# Altium PCB PCB1.PcbDoc
Units mm, origin at the board's own origin, x right, y up, seen from the top; angles counter-clockwise.
Board outline 66.29 x 69.22 mm, 2 copper layers (Top Layer, Bottom Layer); 12 components, 12 nets, 28 pads, 0 vias.
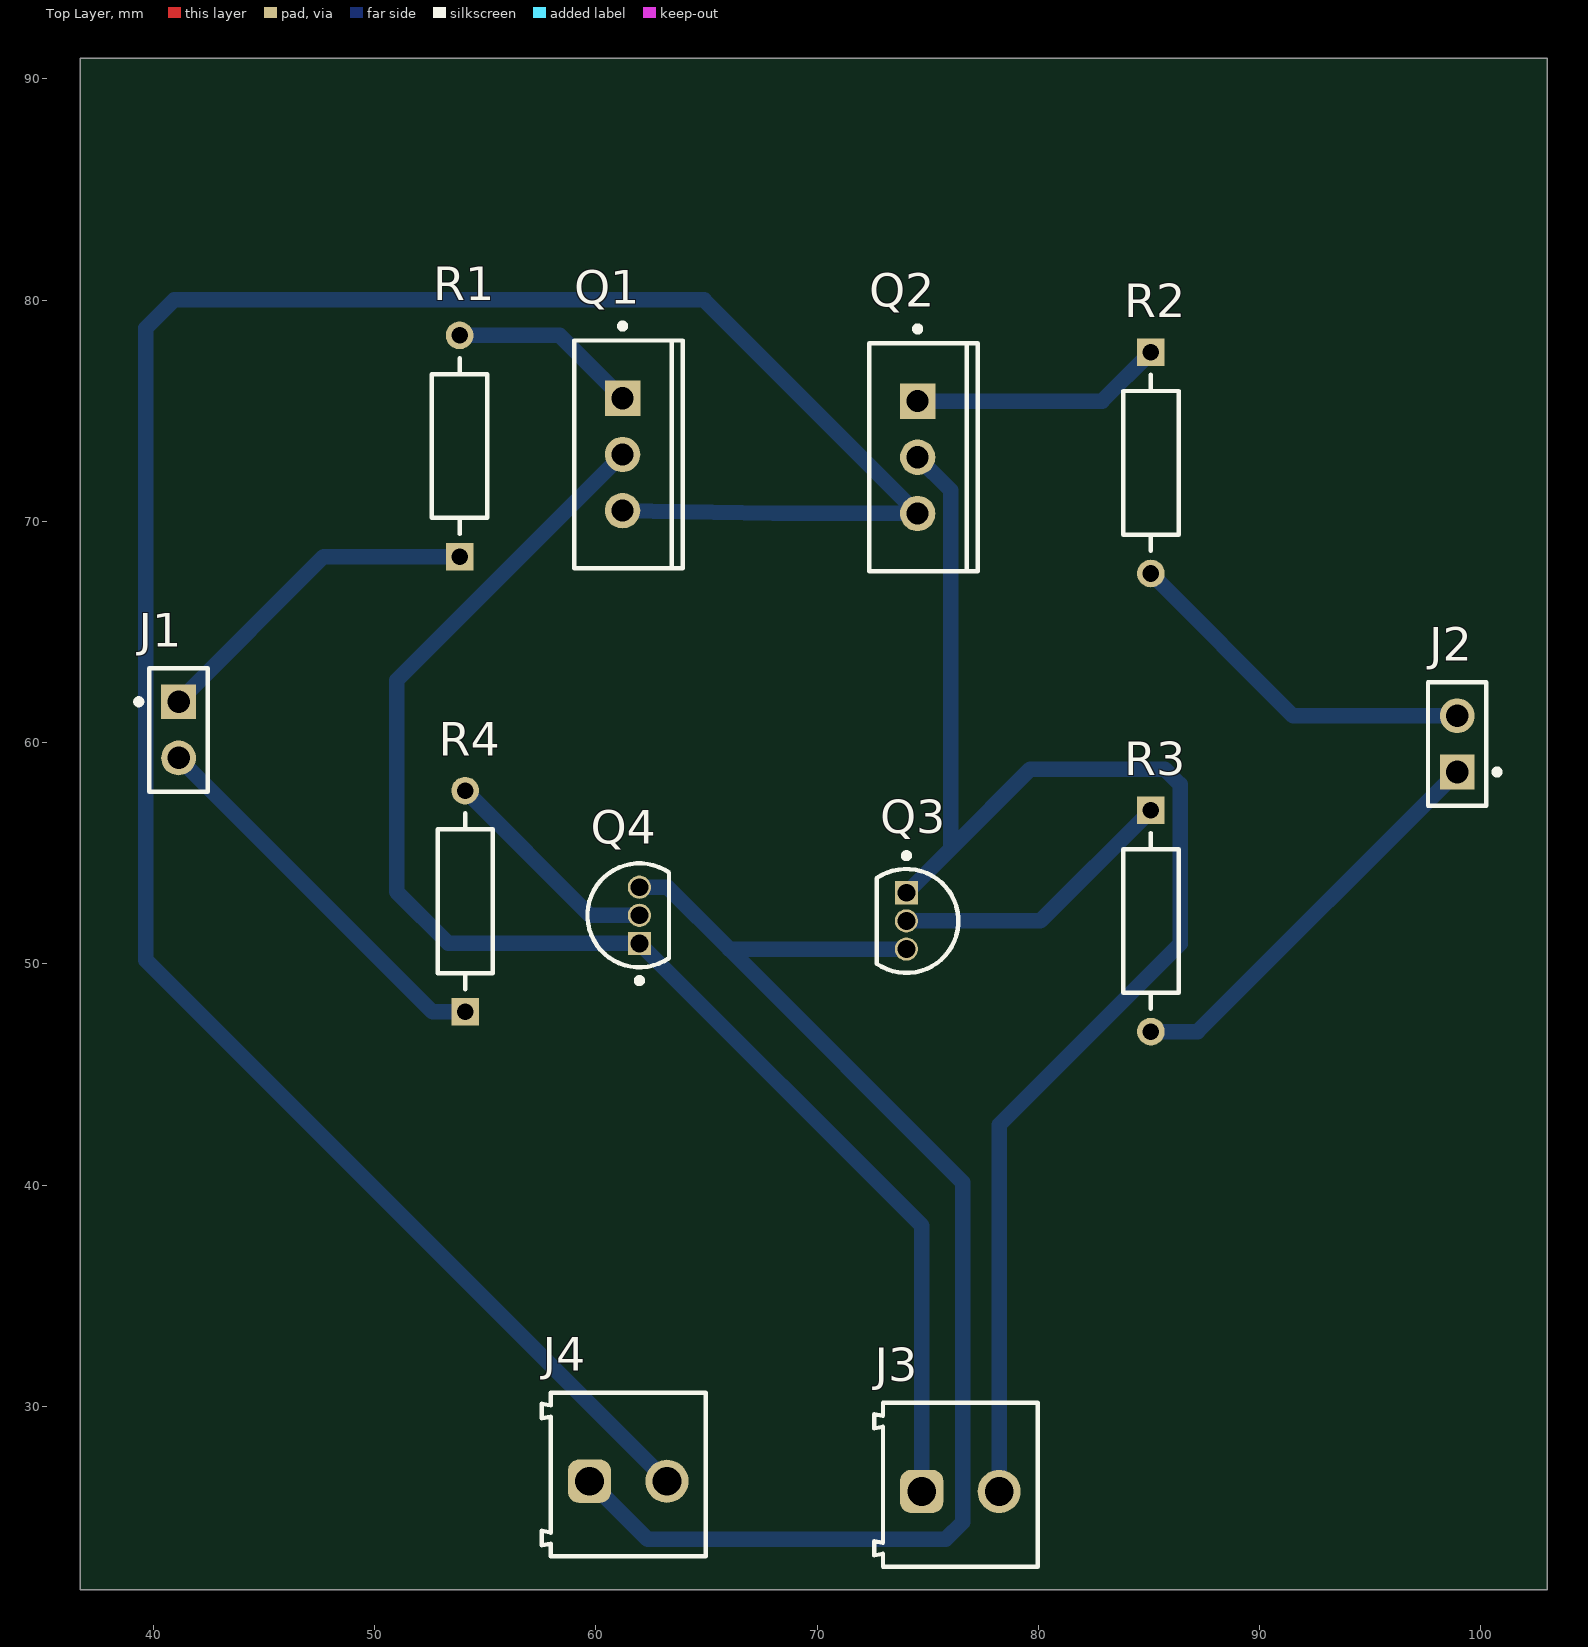
[diagram p0: Top Layer view]
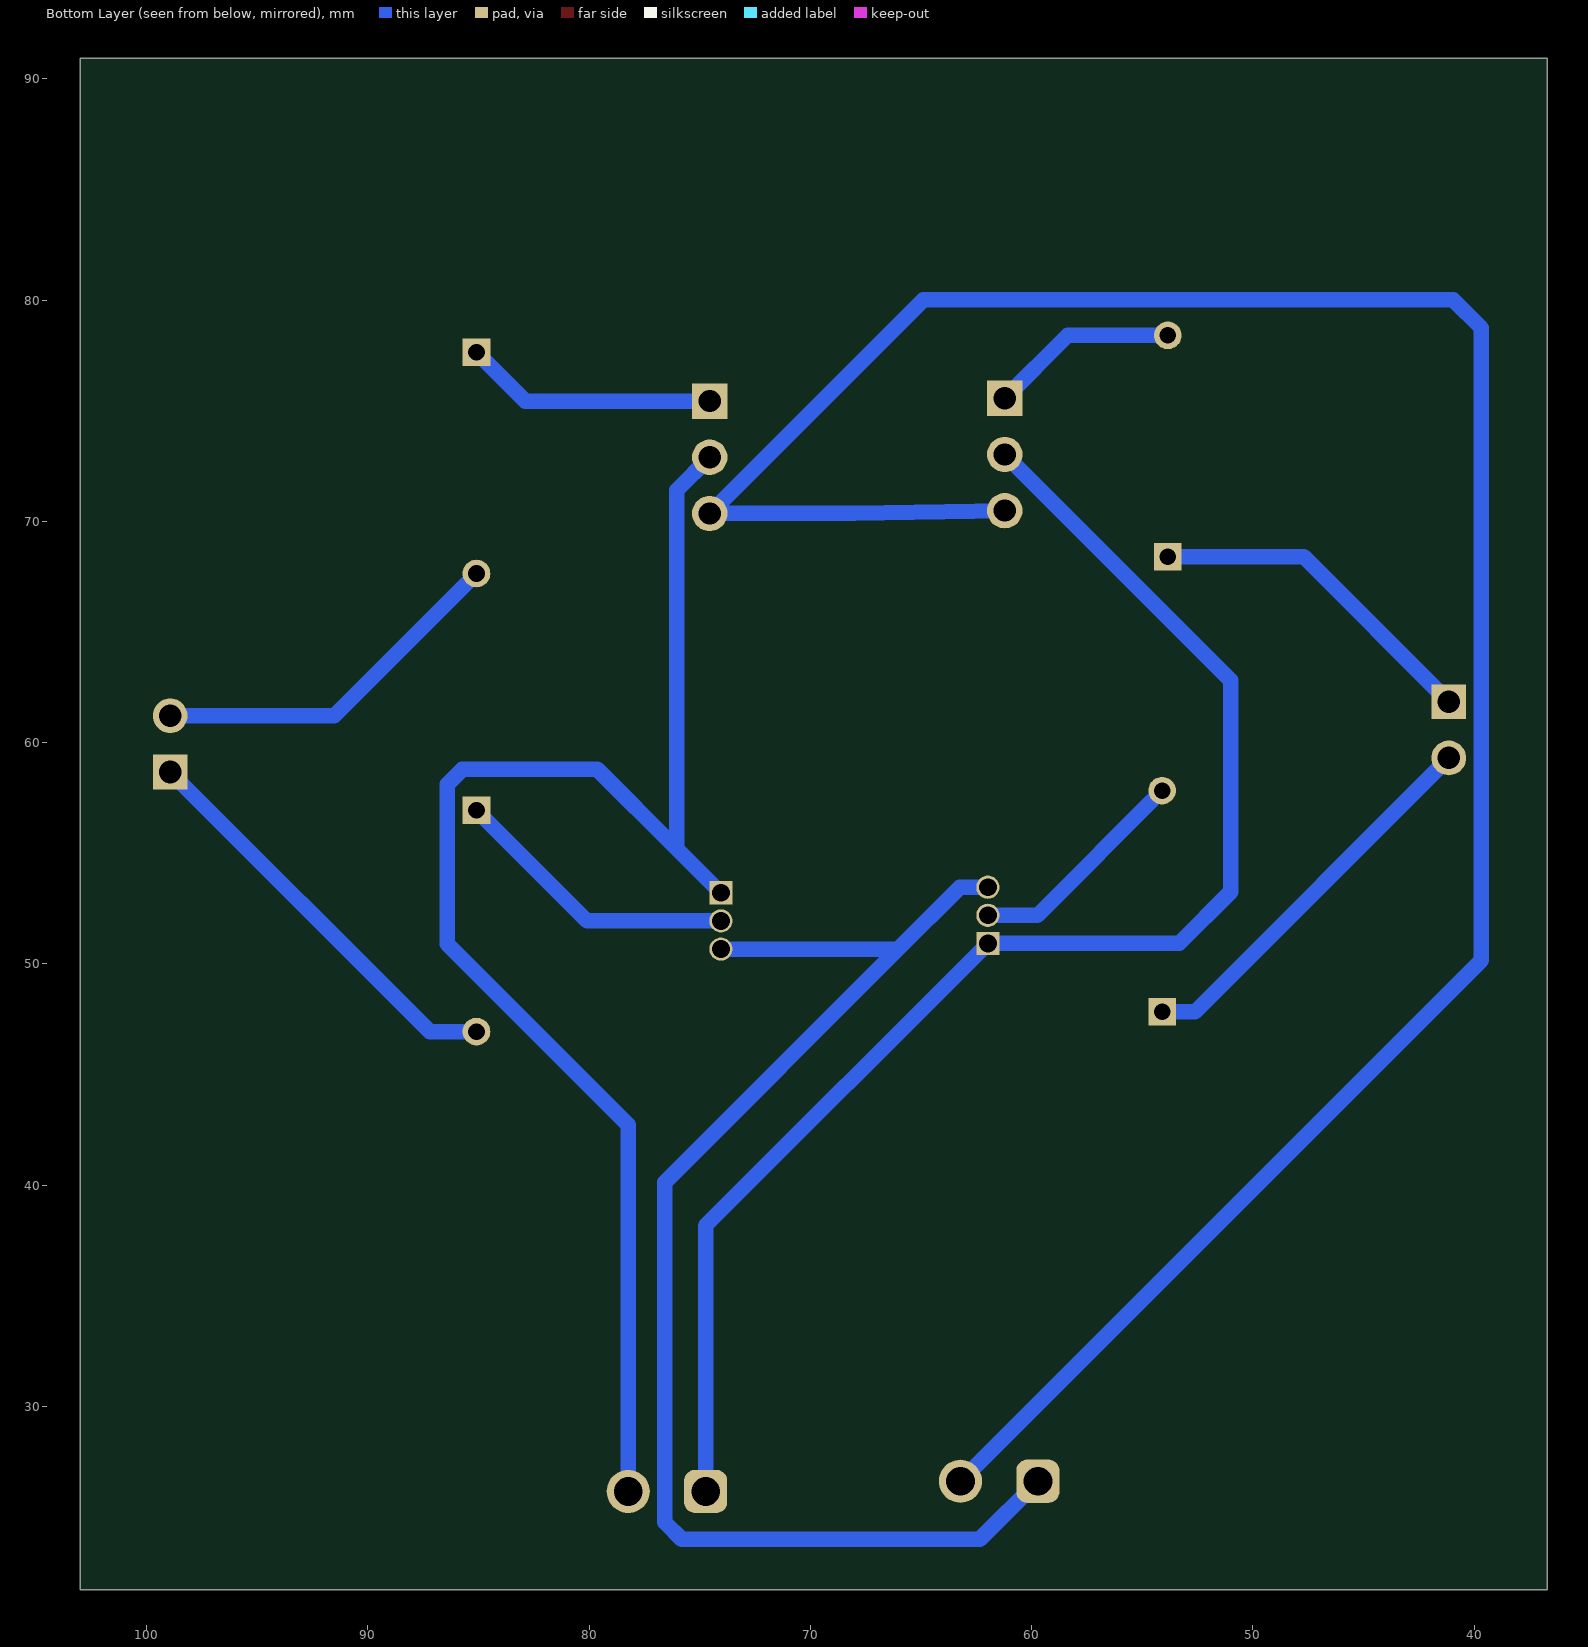
[diagram p1: Bottom Layer view, seen from below]
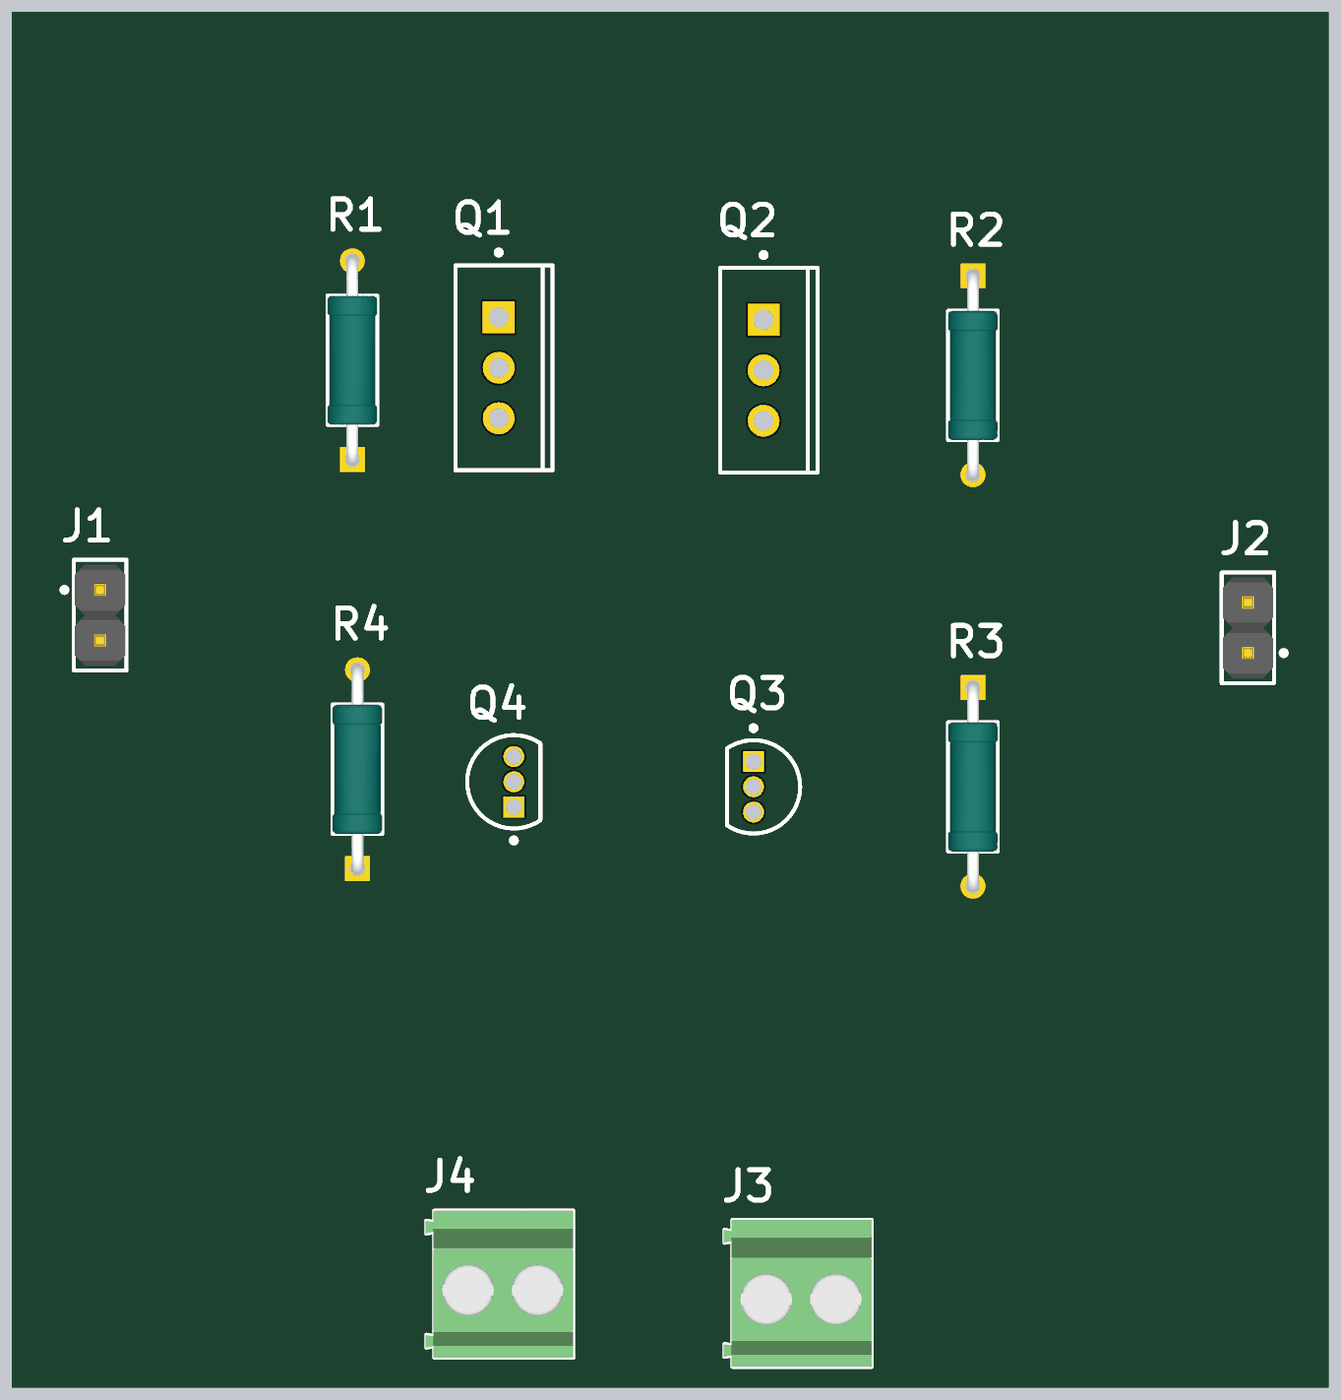
[diagram p2: 3D render of the assembled board from above, using the file's embedded part models]

## Layer stack, top to bottom
Top Solder: solder mask 0.0102, Solder Resist, Dk 3.5
Top Layer: signal copper 0.0356
Dielectric 1: dielectric 0.32, FR-4, Dk 4.8
Bottom Layer: signal copper 0.0356
Bottom Solder: solder mask 0.0102, Solder Resist, Dk 3.5

## Board outline
36.703,21.717 102.997,21.717 102.997,90.932 36.703,90.932

## Design rules (kind name [scope] priority, off if disabled: settings)
Clearance [All] p1: gap=0.33 ignorepadtopadclearanceinfootprint=FALSE
PolygonConnect [All] p1: connectstyle=Relief reliefconductorwidth=0.254 reliefentries=4 polygonreliefangle="90 Angle" airgapwidth=0.254
RoutingLayers [All] p1: top layer_v5=FALSE bottom layer_v5=TRUE
RoutingVias [All] p1: holewidth=0.711 width=1.27 viastyle="Through Hole" minholewidth=0.711 minwidth=1.27 maxholewidth=0.711 maxwidth=1.27
SolderMaskExpansion [All] p1: expansion=0.102 istentingtop=FALSE
UnRoutedNet [All] p1: checkbadconnections=TRUE
Width [All] p1: maxlimit=1 minlimit=0.3 preferedwidth=0.7
28 further rules are at their usual default settings.

## Classes and differential pairs
component class Sheet1: D?

## Components (designator, comment, footprint, x,y, rotation, side; value= is the part's Value field where it differs from the comment)
J1 "M20-9990245" FP-M20-9990245-MFG 41.148,60.579 r270 top
J2 "M20-9990245" FP-M20-9990245-MFG 98.933,59.944 r90 top
J3 "691214110002" 691214110002 76.482,26.462 r0 top
J4 "691214110002" 691214110002 61.468,26.924 r0 top
Q1 "NTP2955" ONSC-TO-220-3-221A-09_AA 61.214,73.025 r0 top
Q2 "NTP2955" ONSC-TO-220-3-221A-09_AA 74.549,72.898 r0 top
Q3 "BS170" ONSC-TO-92-3-29-11 74.041,51.943 r270 top
Q4 "BS170" ONSC-TO-92-3-29-11 61.976,52.197 r90 top
R1 "MRS25000C1000FRP00" FP-MRS25-MFG 53.848,73.406 r90 top
R2 "MRS25000C1000FRP00" FP-MRS25-MFG 85.09,72.644 r270 top
R3 "MRS25000C1000FRP00" FP-MRS25-MFG 85.09,51.943 r270 top
R4 "MRS25000C1000FRP00" FP-MRS25-MFG 54.102,52.832 r90 top

## Footprints (in the part's own frame and the unit in brackets; to place one, negate y for a bottom-side part, rotate by r counter-clockwise, add the part's x,y. Pads: shape width x height; smd on the part's side, far side on the other; paste and mask are expansions set on the pad)
691214110002 [mm] "3.50 mm Horizontal Entry Modular, 2p"
  rrect50% 1.95x1.95 hole 1.3: 1(-1.75,-0.3)
  round 1.95 hole 1.3: 2(1.75,-0.3)
  silkscreen extent -3.9,-3.7 3.5,3.7, body extent -3.95,-3.7 3.5,3.7, height 8.55
FP-M20-9990245-MFG [mm]
  rect 1.57x1.57 hole 1.02 paste-2539.97 mask+0: 1(-1.27,0)
  round 1.57 hole 1.02 paste-2539.97 mask+0: 2(1.27,0)
  silkscreen extent -2.79,-1.92 2.79,1.32, body extent -2.89,-1.42 2.89,1.42, height 0.25
FP-MRS25-MFG [mm]
  rect 1.25x1.25 hole 0.75 paste-2539.97 mask+0: 1(-5,0)
  round 1.25 hole 0.75 paste-2539.97 mask+0: 2(5,0)
  silkscreen extent -3.97,-1.25 3.97,1.25, body extent -5.72,-1.35 5.72,1.35, height 0.25
ONSC-TO-92-3-29-11 [mm] "TO, 3-Leads, Body Dia 4.7mm, Pitch 1.27mm"
  rect 1.05x1.05 hole 0.8: 1(-1.27,0)
  round 1.05 hole 0.8: 2(0,0) 3(1.27,0)
  silkscreen extent -3.07,-1.34 2.35,2.35, body extent -2.35,-1.33 2.36,2.36, height 7.87
ONSC-TO-220-3-221A-09_AA [mm] "FM, 3-Leads, Body 10.3x4.85mm, Pitch 2.54mm"
  rect 1.6x1.6 hole 1: 1(0,2.54)
  round 1.6 hole 1: 2(0,0) 3(0,-2.54)
  silkscreen extent -2.19,-5.15 2.72,5.92, body extent -2.16,-5.15 2.69,5.15, height 19.68

## Part data
J1 J2: library part CMP-15831-000105-1, "CONN HEADER VERT 2POS 2.54MM", Case/Package=SIL, Color=Black, Contact Resistance=25mR, Current=3A, Flammability Rating="UL94 V-0", Insulation Resistance=10GR, Max Operating Temperature=105°C, Min Operating Temperature=-40°C, Package Quantity=1000, Voltage=50V, Voltage Rating (AC)=750V, Connector Type="Male Pin", Contact Finish - Mating=GOLD, Contact Material=Brass, Contact Mating Length=0.24inch, Contact Plating=Gold, Contact Shape=Square, Contact Type="Male Pin", Current Rating=3A, Depth=2.54mm, Fastening Type=Pull, Gender=Male, Height=0.12inch, Housing Color=Black, Housing Material=Nylon, Insulation Color=Black, Insulation Material=Nylon, Lead Pitch=2.54mm, Length=5.08mm, Mated Stacking Heights=16.54mm, Mating Cycles=300, Max Current Rating=3A, Mount="Through Hole", Number of Contacts=2, Number of Poles=2, Number of Positions=2, Number of Rows=1, Orientation=Straight, Packaging=Bulk, Pitch=2.54mm, Radiation Hardening=No, Reach SVHC Compliant=Yes, Series=M20, Termination=Solder, Weight=0.25lb, Width=0.25inch, Working Voltage=750V
J3 J4: library part CMP-1502-02464-2, Color="Blue, Green", Current=10A, Max Operating Temperature=105°C, Min Operating Temperature=-40°C, Voltage=300V, Contact Material=Brass, Contact Plating="Brass, Tin", Current Rating=10A, Height=8.7mm, Housing Material=Nylon, Lead Pitch=3.5mm, Length=7.4mm, Mount="Through Hole", NexarPartId=18818288, Number of Contacts=2, Number of Levels=1, Number of Pins=2, Number of Positions Per Level=2, Number of Rows=1, Packaging=Box, Pitch=3.5052mm, Plating="Brass, Steel", REACH SVHC=Unknown, RoHS=Compliant, Stripping Length=-6mm, Termination=Screw, Voltage Rating=300V, Width=7.9mm, Wire Gauge (Max)=24AWG, Wire Gauge (Min)=16AWG, Wire/Cable Gauge=24AWG
Q1 Q2: library part CMP-1058-00865-1, "Power MOSFET, -60 V, -12 A, Single P-Channel, 3-Pin TO-220, Tube", Manufacturer="On Semiconductor", Package Type=TO-220-3, Channel Polarity="P Channel", Ciss Typ (pF)=507, ComponentLink1Description="Manufacturer URL", ComponentLink1URL=http://www.onsemi.com/, ComponentLink2Description=Datasheet, ComponentLink2URL=http://www.onsemi.cn/pub_link/Collateral/NTP2955-D.PDF, ComponentLink3Description="Package Specification", ComponentLink3URL=http://www.onsemi.com/pub_link/Collateral/MAC16C-D.PDF, Configuration=Single, Coss Typ (pF)=150, Crss Typ (pF)=48, DatasheetVersion="Rev. 2", ID Max (A)=12, Mounting Technology="Through Hole", PackageDescription="3-Pin Flange Mount, Vertical Straight Lead, Body 9.97 x 4.445 mm, Pitch 2.54 mm", PackageReference=TO-220-3-221A-09_AA, PackageVersion="Rev. AA", Packing=Tube, PartNumber=NTP2955, Qrr Typ (nC)=126, V(BR)DSS Min (V)=60, VGS Max (V)=20, VGS(th) Max (V)=4
Q3 Q4: library part CMP-1058-00929-1, "Small Signal MOSFET, 500 mA, 60 V, N-Channel, 3-Pin TO-92, Bulk Box", Manufacturer="On Semiconductor", Package Type=TO-92, Channel Polarity="N Channel", ComponentLink1Description="Manufacturer URL", ComponentLink1URL=http://www.onsemi.com/, ComponentLink2Description=Datasheet, ComponentLink2URL=http://www.onsemi.com/pub_link/Collateral/BS170-D.PDF, ComponentLink3Description="Package Specification", ComponentLink3URL=http://www.onsemi.cn/pub_link/Collateral/2N6426-D.PDF, Configuration=Single, DatasheetVersion="Rev. 6", ID Max (A)=0.5, Mounting Technology="Through Hole", PackageDescription="3-Pin Transistor Outline, Body 4.825 x 3.685 mm, Pitch 1.27 mm", PackageReference=TO-92-3-29-11_AM_SL, PackageVersion="Rev. AM", Packing="Bulk Box", PartNumber=BS170, PD Max (W)=0.35, V(BR)DSS Min (V)=60, VGS Max (V)=20, VGS(th) Max (V)=3
R1 R2 R3 R4: library part CMP-00030-42757237-1, "MRS25000C1000FRP00 Resistor, 100 Ohm, ± 1%, 600 mW, Axial Leaded, Metal Film (Thin Film), Professional", Case/Package=Axial, Max Operating Temperature=155°C, Max Power Dissipation=600mW, Min Operating Temperature=-55°C, Resistance=100Ω, Temperature Coefficient=50ppm/°C, Tolerance=1%, Voltage Rating=350V, Composition="Metal Film, Thin Film", Contact Plating=Tin, Diameter=2.5mm, Lead Diameter=600µm, Lead Free="Lead Free", Length=6.5mm, Military Standard=Not, Mount="Through Hole", NexarPartId=42757237, Number of Pins=2, Number of Terminations=2, Packaging="Tape & Reel (TR)", Power Rating=600mW, Radiation Hardening=No, REACH SVHC=Unknown, RoHS=Compliant, Schedule B="8533210090, 8533210090", Termination=Axial, Voltage Rating (DC)=350V, Width=2.5mm

## Nets (pads, with @x,y where several pads share a name; then routed paths per layer and width w, separated by ;. In a path a pad name is that pad's centre, name@x,y a point inside that pad or via, vN(x,y) a via of type N, cw(c..) or ccw(c..) an arc to the next point about the centre after c; other vN are vias at no path point)
NetJ1_1: J1.1 R1.1 | length 15.4
  Bottom Layer w0.7: J1.1 47.705,68.406 R1.1
NetJ1_2: J1.2 R4.1 | length 17.7
  Bottom Layer w0.7: J1.2 52.625,47.832 R4.1
NetJ2_1: J2.1 R3.2 | length 18.7
  Bottom Layer w0.7: R3.2 87.202,46.943 J2.1
NetJ2_2: J2.2 R2.2 | length 16.5
  Bottom Layer w0.7: R2.2 91.52,61.214 J2.2
NetJ3_1: J3.1 Q1.2 Q4.1 | length 66
  Bottom Layer w0.7: Q1.2 51.003,62.814 51.003,53.264 53.34,50.927 Q4.1 74.732,38.171 J3.1
NetJ3_2: J3.2 Q2.2 Q3.1 | length 68.6
  Bottom Layer w0.7: Q3.1 76.048,55.22 ; Q2.2 76.048,71.399 76.048,55.22 ; J3.2 78.232,42.723 86.411,50.902 86.411,58.115 85.725,58.801 79.629,58.801 76.048,55.22
NetJ4_1: J4.1 Q3.3 Q4.3 | length 61.8
  Bottom Layer w0.7: J4.1 62.343,23.999 75.811,23.999 76.577,24.765 76.577,40.136 66.04,50.673 ; Q4.3 63.246,53.467 66.04,50.673 ; Q3.3 66.04,50.673
NetJ4_2: J4.2 Q1.3 Q2.3 | length 114.6
  Bottom Layer w0.7: Q1.3 68.021,70.358 Q2.3 64.897,80.01 40.945,80.01 39.675,78.74 39.675,50.167 J4.2
NetQ1_1: Q1.1 R1.2 | length 8.5
  Bottom Layer w0.7: R1.2 58.373,78.406 Q1.1
NetQ2_1: Q2.1 R2.1 | length 11.5
  Bottom Layer w0.7: Q2.1 82.884,75.438 R2.1
NetQ3_2: Q3.2 R3.1 | length 13.1
  Bottom Layer w0.7: Q3.2 80.09,51.943 R3.1
NetQ4_2: Q4.2 R4.2 | length 10.2
  Bottom Layer w0.7: R4.2 59.737,52.197 Q4.2